# EAGLE board 1 (EAGLE 7.5.0)
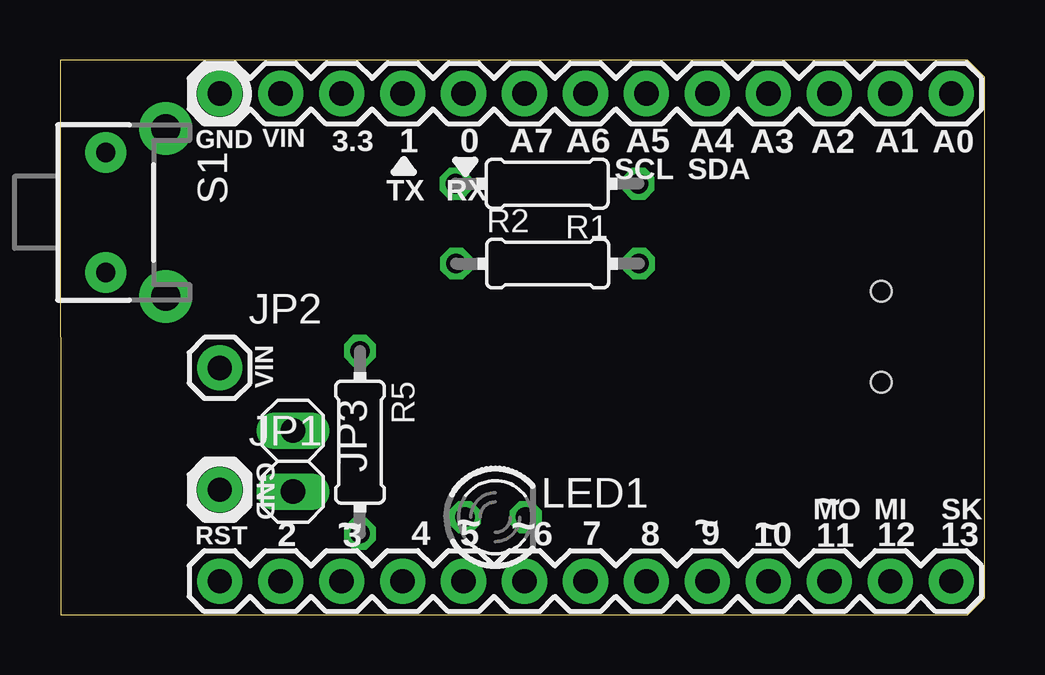
[diagram p0: board, top side]
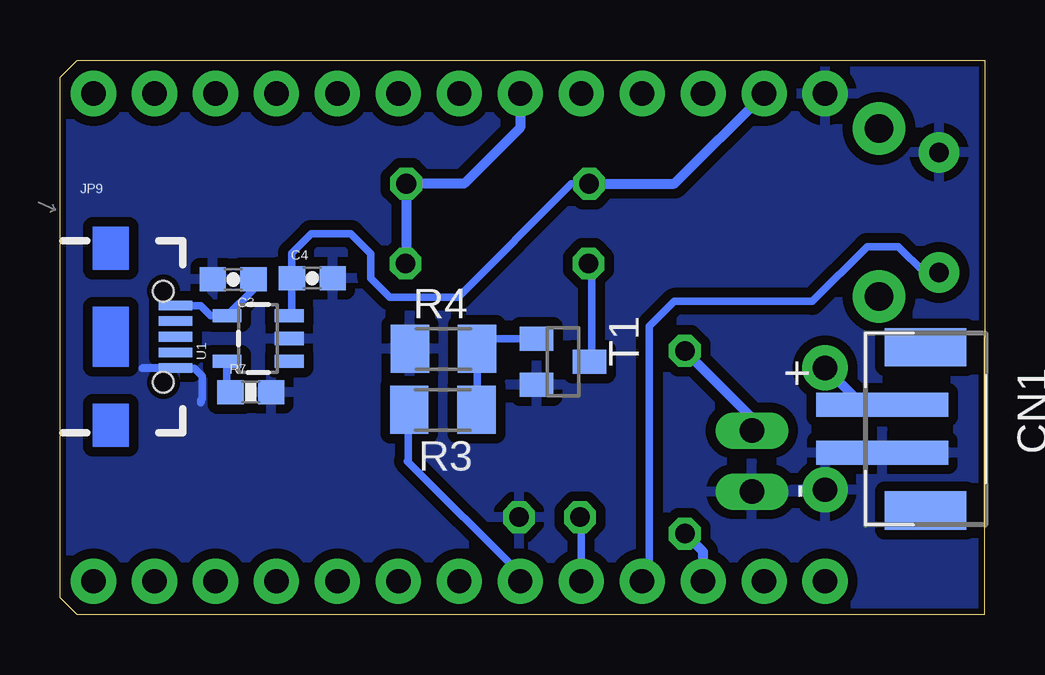
[diagram p1: board, bottom side, seen from below]

Size 38.53 x 23.11 mm. Coordinates in mm from the lower left corner, seen from the top.
Outline: 0.03,0 37.82,0 38.53,0.71 38.53,22.4 37.82,23.11 0,23.11 0.03,0
Copper layers (1*16): Top 0.035mm / dielectric 1.5mm / Bottom 0.035mm
Design rules "ITEADstudio_DRC *": minimum track width 6mil, minimum drill 12mil, track to track 16mil, track to pad 12mil, pad to pad 6mil, via to via 6mil, smd to smd 0mil, copper to edge 10mil, drill to drill 10mil, minimum pad ring 10mil, minimum via ring 6mil, stop-mask expansion 2mil, vias tented up to drill 100mil, thermal gap 15mil
Net classes: 1 power: width 0.381 mm, clearance 0.254 mm

## Footprints (pad centres in the part's own frame; a part is rotated, then mirrored left to right if it is on the bottom)
1X13 = drill 1.016 pad 1.88: 1 0,0; 2 2.54,0; 3 5.08,0; 4 7.62,0; 5 10.16,0; 6 12.7,0; 7 15.24,0; 8 17.78,0; 9 20.32,0; 10 22.86,0; 11 25.4,0; 12 27.94,0; 13 30.48,0
0603-CAP = smd 1.1 x 1: 1 -0.85,0; 2 0.85,0
JST-PH-2-SMT = smd 1 x 5.5: 1 -1,-1.8; 2 1,-1.8 | smd 1.6 x 3.4: NC1 -3.4,0; NC2 3.4,0
1X01 = drill 1.016 pad 1.88: 1 0,0
1X02 = drill 1.016 long: 1 -1.27,0; 2 1.27,0
USB-AB-MICRO-SMD_V03 = smd 1.4 x 0.4: D+1 2.7,0; D-1 2.7,0.65; GND1 2.7,-1.3; ID1 2.7,-0.65; VBUS1 2.7,1.3 | hole 0.85: 2.2,1.9; 2.2,-1.9
LED3MM = drill 0.813 octagon: A -1.27,0; K 1.27,0
0204/7 = drill 0.813 octagon: 1 -3.81,0; 2 3.81,0
M1206 = smd 1.6 x 2: 1 -1.4,0; 2 1.4,0
0603-RES = smd 1.1 x 1: 1 -0.85,0; 2 0.85,0
TACTILE-PTH-SIDEEZ = drill 0.8 pad 1.7: 1 -2.5,0; 2 2.5,0 | drill 1.2 pad 2.2: ANCHOR1 -3.5,2.5; ANCHOR2 3.5,2.5
SOT23 = smd 1 x 1.4: 1 -0.95,-1.1; 2 0.95,-1.1; 3 0,1.1
SOT23-5 = smd 0.55 x 1.2: 1 -0.95,-1.3; 2 0,-1.3; 3 0.95,-1.3; 4 0.95,1.3; 5 -0.95,1.3

## Placement (x,y rotation side)
ANALOGSIDE  M13  [1X13]  37.13,21.72 180 top
C3  4.7uF  [0603-CAP]  31.32,13.97 180 bottom
C4  4.7uF  [0603-CAP]  28.02,14.02 0 bottom
CN1  [JST-PH-2-SMT]  2.46,7.75 270 bottom
DIGITALSIDE  M13  [1X13]  37.13,1.4 180 top
JP1  M01PTH  [1X01]  6.65,5.21 0 top
JP2  M01PTH  [1X01]  6.65,10.29 0 top
JP3  [1X02]  9.7,6.4 270 top
JP9  Micro USB  [USB-AB-MICRO-SMD_V03]  36.42,11.58 0 bottom
LED1  [LED3MM]  18.14,4.06 0 top
R1  [0204/7]  20.29,17.96 180 top
R2  [0204/7]  20.32,14.63 0 top
R3  [M1206]  22.58,8.53 180 bottom
R4  [M1206]  22.56,11.07 0 bottom
R5  [0204/7]  12.5,7.19 270 top
R7  2.0k  [0603-RES]  30.58,9.27 0 bottom
S1  SWITCH-MOMENTARY-2SIDE_EZ  [TACTILE-PTH-SIDEEZ]  1.91,16.76 270 top
T1  BC850  [SOT23]  17.58,10.54 270 bottom
U1  MCP73831  [SOT23-5]  30.28,11.51 90 bottom

## Library data of the parts
ANALOGSIDE DIGITALSIDE JP1 JP2 = SparkFun-Connectors
C3 C4 = SparkFun-Capacitors; PROD_ID: CAP-08280
CN1 = adafruit
JP3 = pinhead
JP9 = SparkFun-Connectors; PROD_ID: CONN-11794
LED1 = led
R1-R5 = rcl
R7 = SparkFun-Resistors; PROD_ID: RES-08296
S1 = SparkFun-Electromechanical
T1 = transistor
U1 = SparkFun-PowerIC; PROD_ID: IC-09995

## Nets
AGND [power]: CN1.2 JP1.1 JP3.2
GND [power]: ANALOGSIDE.13 C3.2 C4.2 JP9.GND1 LED1.K R4.1 R7.2 S1.1 T1.2 U1.2
N$1: DIGITALSIDE.10 S1.2
N$2: JP3.1 R5.1
N$3: DIGITALSIDE.9 LED1.A
N$4: ANALOGSIDE.11
N$5: C3.1 JP9.VBUS1 U1.4
N$6: ANALOGSIDE.8 R1.1 R2.2
N$7: R2.1 T1.3
N$8: R3.1 R4.2 T1.1
N$9: DIGITALSIDE.8 R3.2
N$10: DIGITALSIDE.11 R5.2
PROG: R7.1 U1.5
VCC: CN1.1 JP2.1
VIN: ANALOGSIDE.12 C4.1 R1.2 U1.3

## Tracks (layer width: path | path; a pad name or v marks a point on that pad's centre or on a via)
AGND
  pour Bottom: 5.03,23.75 39.04,23.75 39.04,-0.46 0.03,-0.38 0.03,23.8
GND
  Bottom 0.305: JP9.GND1 35.08,10.28 35.1,10.26 32.94,10.26 32.61,9.93 32.61,8.99 32.66,8.94 32.64,8.91 32.64,8.87 32.66,8.84
  pour Bottom: -0.05,23.34 38.71,23.19 38.71,-0.18 -0.05,-0.03
N$1
  Bottom 0.305: S1.2 2.53,14.26 3.61,15.34 4.9,15.34 7.19,13.06 12.93,13.06 13.97,12.01 13.97,1.7 DIGITALSIDE.10
N$2
  Bottom 0.406: JP3.1 9.7,8.2 R5.1
N$3
  Bottom 0.305: DIGITALSIDE.9 16.81,4.01 LED1.A
N$5
  Bottom 0.305: C3.1 30.47,13.56 U1.4 32.24,12.46 32.66,12.88 JP9.VBUS1
N$6
  Bottom 0.406: ANALOGSIDE.8 19.35,20.3 21.69,17.96 R1.1 24.1,15.52 R2.2
N$7
  Bottom 0.305: T1.3 16.38,10.63 16.38,14.5 R2.1
N$8
  Bottom 0.305: T1.1 20.74,11.49 R4.2 21.16,8.56 R3.1
N$9
  Bottom 0.305: DIGITALSIDE.8 19.35,1.7 24.05,6.4 24.03,6.43 24.03,8.49 R3.2
N$10
  Bottom 0.406: DIGITALSIDE.11 11.73,2.62 R5.2
PROG
  Bottom 0.305: U1.5 31.58,9.42 R7.1
VCC
  Bottom 0.406: CN1.1 5.11,8.75 JP2.1
VIN
  Bottom 0.305: R1.2 17.22,17.96 21.95,13.23 24.79,13.23 25.58,14.02 25.58,15.04 26.42,15.88 28.07,15.88 28.88,15.06 28.88,14.03 C4.1 28.87,12.57 U1.3
  Bottom 0.406: ANALOGSIDE.12 9.19,21.69 12.93,17.96 R1.2

## Text on the board
_tsilk: VIN | 3.3 | 1 | 0 | A7 | A6 | A5 | A4 | A3 | A2 | A1 | GND | A0 | TX | RX | SCL | SDA | VIN | GND | 2 | 3 | 4 | 5 | 6 | 7 | 8 | 9 | 10 | MO | ~ | 11 | MI | 12 | SK | 13 | RST | ~ | ~ | ~ | ~ | ~